# Altium PCB MotionGlove.PcbDoc (part 1 of 2)
Units mm, origin at the board's own origin, x right, y up, seen from the top; angles counter-clockwise.
Board outline 57.6 x 36.45 mm, 2 copper layers (Top Layer, Bottom Layer); 120 components, 83 nets, 444 pads, 151 vias.
Unrouted connection lines stored in the file: 1.
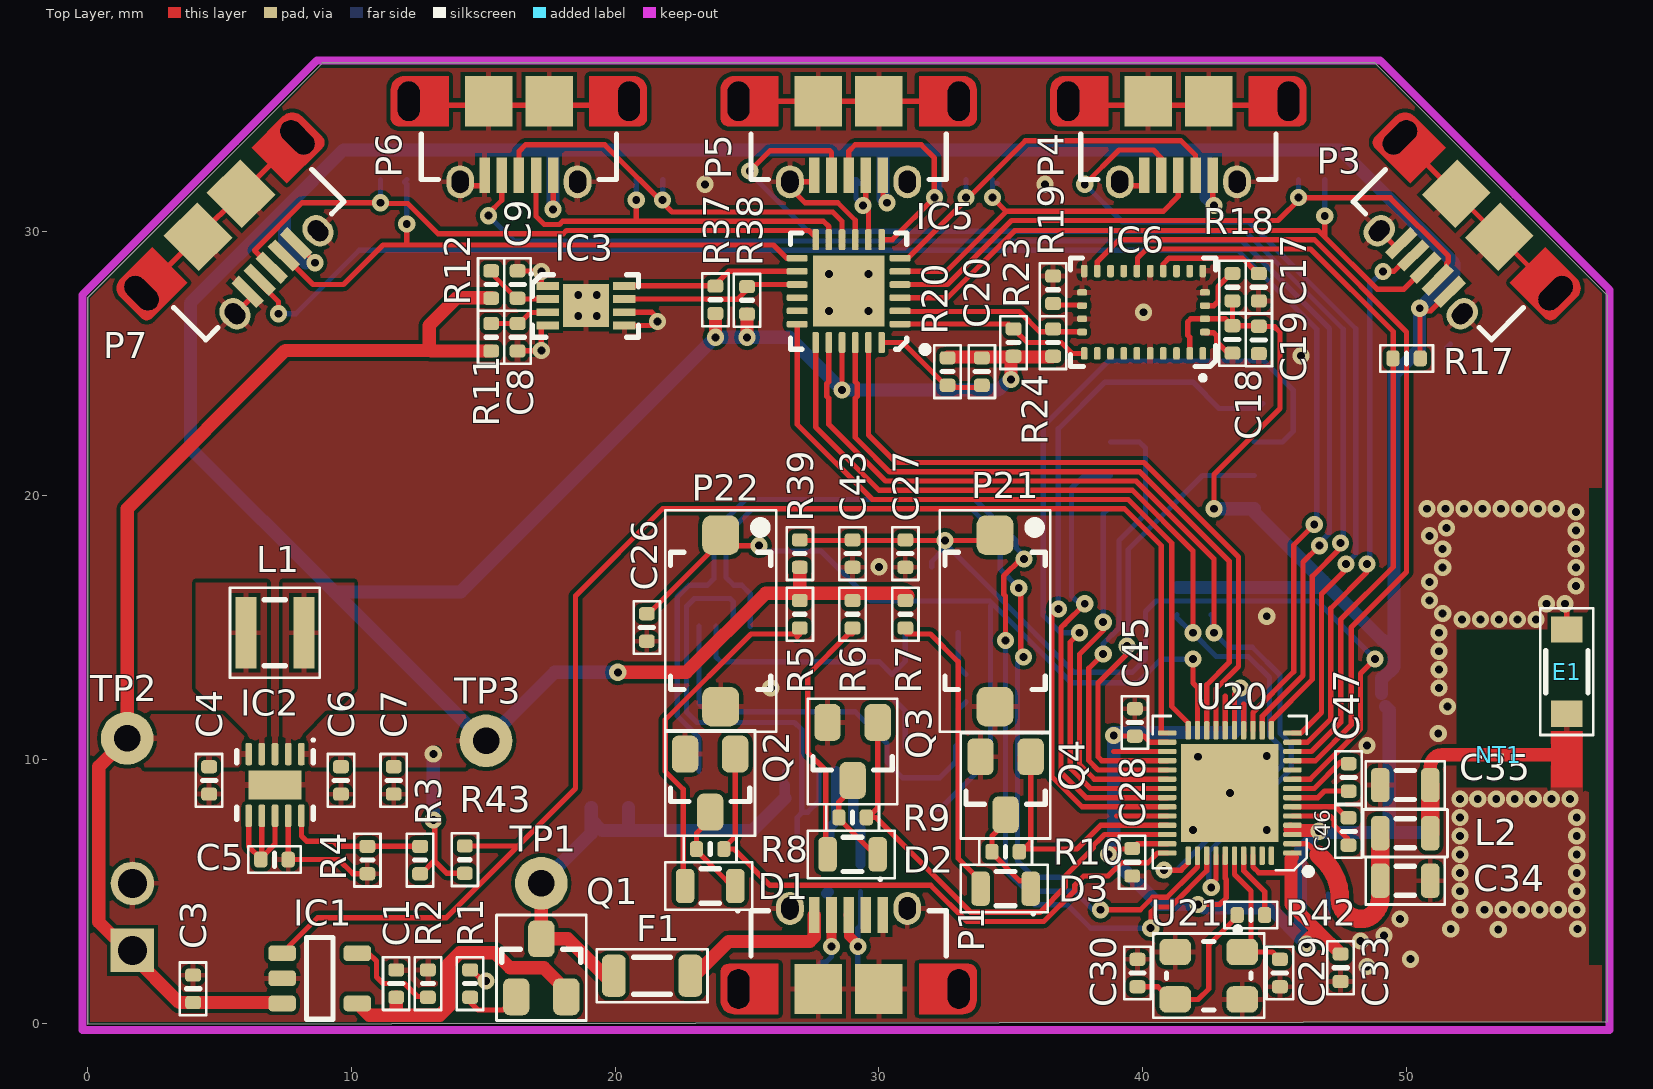
[diagram p0: Top Layer view]
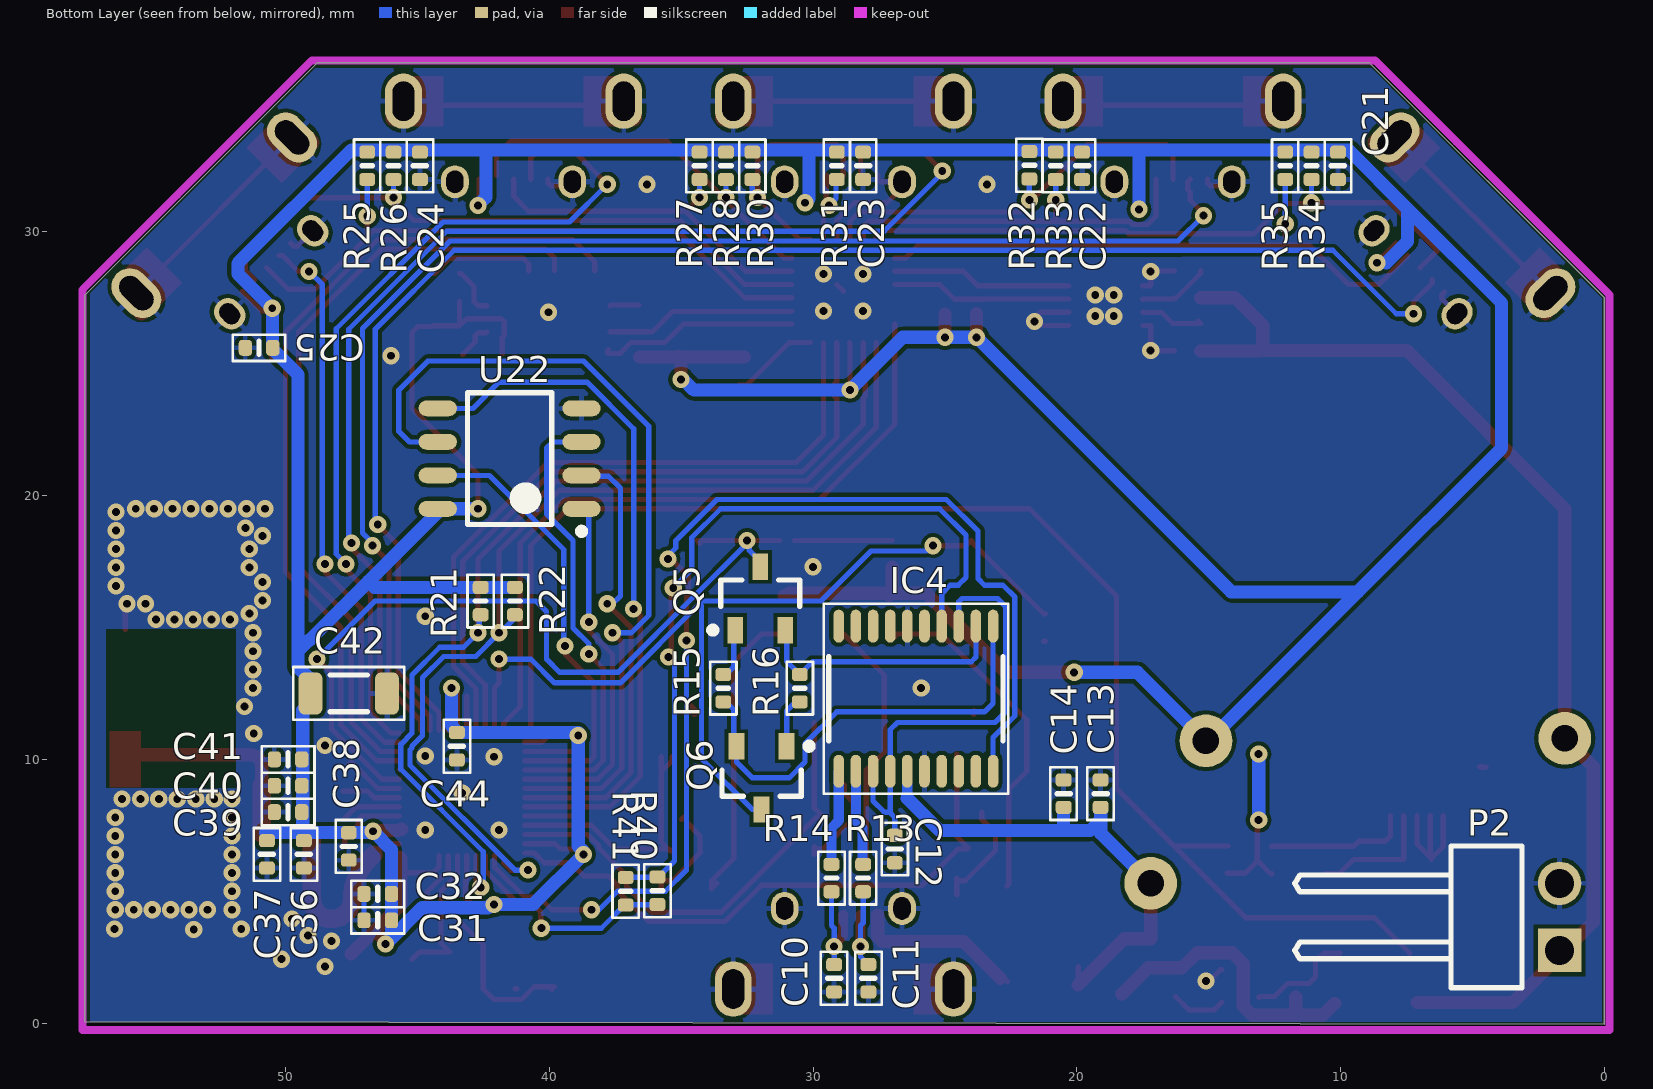
[diagram p1: Bottom Layer view, seen from below]

## Layer stack, top to bottom
Top Solder: solder mask 0.0102, Solder Resist, Dk 3.5
Top Layer: signal copper 0.0356
Dielectric 1: dielectric 0.32, FR-4, Dk 4.8
Bottom Layer: signal copper 0.0356
Bottom Solder: solder mask 0.0102, Solder Resist, Dk 3.5

## Board outline
0,-0.05 0,27.5 8.9,36.4 48.8,36.4 57.6,27.6 57.6,0.05

## Design rules (kind name [scope] priority, off if disabled: settings)
Clearance [All] p1: gap=0.15 ignorepadtopadclearanceinfootprint=FALSE except(0: Arc-Hole Track-Hole SMDPad-Hole THPad-Hole Via-Hole Fill-Hole Poly-Hole Region-Hole Text-Hole)
DiffPairsRouting [All] p1: maxlimit=0.254 minlimit=0.254 mostfreqgap=0.254 toplayer_minwidth=0.381 toplayer_maxwidth=0.381 toplayer_prefwidth=0.381 bottomlayer_minwidth=0.381 bottomlayer_maxwidth=0.381 bottomlayer_prefwidth=0.381 maxuncoupledlength=12.7
HoleSize [All] p1: absolutevalues=TRUE maxlimit=6 minlimit=0.3 maxpercent=80.000 minpercent=20.000
HoleToHoleClearance [All] p1: gap=0.3 allowstackedmicrovias=FALSE
MinimumAnnularRing [not IsVia] p1: minimumring=0.2
MinimumSolderMaskSliver [All] p1: minsoldermaskwidth=0.15
PlaneClearance [All] p1: clearance=0.5
PlaneConnect [All] p1: planeconnectstyle=Relief reliefexpansion=0.5 reliefentries=4 reliefconductorwidth=0.3 reliefairgap=0.3
PolygonConnect PolygonConnect_Via [IsVia] p1: connectstyle=Direct reliefconductorwidth=0.2 reliefentries=4 polygonreliefangle="90 Angle" airgapwidth=0.15
PolygonConnect [All] p2: connectstyle=Relief reliefconductorwidth=0.2 reliefentries=4 polygonreliefangle="90 Angle" airgapwidth=0.15
RoutingVias [All] p1: holewidth=0.3 width=0.65 viastyle="Through Hole" minholewidth=0.3 minwidth=0.65 maxholewidth=0.3 maxwidth=0.65
ShortCircuit ShortCircuit_antenna [InNet('GND') vs InNet('NetC37_2')] p1: allowed=TRUE
ShortCircuit [All] p2: allowed=FALSE
SilkToSilkClearance [All vs not (AsMM(Width) = 0.099)] p1: silktosilkclearance=0.01
SilkToSolderMaskClearance [IsPad vs not (AsMM(Width) = 0.099)] p1: minsilkscreentomaskgap=0.01 clearancetoexposedcopper=TRUE
SolderMaskExpansion SolderMaskExpansion_Via [IsVia] p1: expansion=-0.125
SolderMaskExpansion [All] p2: expansion=0.05
Width [All] p1: maxlimit=3 minlimit=0.15 preferedwidth=0.2
21 further rules are at their usual default settings.

## Classes and differential pairs
net class CoplanarWaveguide: LNA_IN
differential pair USB_IC: +USB_IC_P -USB_IC_N
differential pair D-: +D- -D-
differential pair D+: +D+ -D+

## Components (designator, comment, footprint, x,y, rotation, side; value= is the part's Value field where it differs from the comment)
C1 "4u7" CAPC1005X55 11.7,1.5 r270 top
C3 "4u7" CAPC1005X55 4,1.3 r270 top
C4 "4u7" CAPC1005X55 4.606,9.202 r90 top
C5 "100n" CAPC1005X55 7.086,6.202 r0 top
C6 "4u7" CAPC1005X55 9.606,9.202 r90 top
C7 "4u7" CAPC1005X55 11.606,9.202 r90 top
C8 "100n" CAPC1005X55 16.3,26 r90 top
C9 "4u7" CAPC1005X55 16.3,28 r270 top
C10 "47pF" CAPC1005X55 29.2,1.7 r270 bottom value=47p
C11 "47pF" CAPC1005X55 27.9,1.7 r90 bottom value=47p
C12 "100n" CAPC1005X55 26.9,6.6 r90 bottom
C13 "4u7" CAPC1005X55 19.1,8.7 r90 bottom
C14 "100n" CAPC1005X55 20.5,8.7 r90 bottom
C17 "100n" CAPC1005X55 44.4,27.9 r90 top
C18 "100n" CAPC1005X55 43.4,25.92 r90 top
C19 "100n" CAPC1005X55 44.4,25.9 r90 top
C20 "4u7" CAPC1005X55 33.9,24.7 r90 top
C21 "100n" CAPC1005X55 10.1,32.5 r90 bottom
C22 "100n" CAPC1005X55 19.8,32.5 r90 bottom
C23 "100n" CAPC1005X55 28.1,32.5 r90 bottom
C24 "100n" CAPC1005X55 44.9,32.5 r90 bottom
C25 "100n" CAPC1005X55 51,25.6 r180 bottom
C26 "100n" CAPC1005X55 21.2,15 r270 top
C27 "100n" CAPC1005X55 31,17.8 r270 top
C28 "100n" CAPC1005X55 39.6,6.1 r270 top
C29 "22pF" CAPC1005X55 45.2,1.9 r270 top value=150p
C30 "22pF" CAPC1005X55 39.8,1.9 r90 top value=150p
C31 "1u" CAPC1005X55 46.5,3.9 r180 bottom
C32 "100n" CAPC1005X55 46.5,4.9 r180 bottom
C33 "100n" CAPC1005X55 47.5,2.1 r90 top
C34 "1p" CAPC2012X100 49.95,5.4 r180 top
C35 "1p" CAPC2012X100 49.95,9.025 r0 top
C36 "100n" CAPC1005X55 49.3,6.4 r90 bottom
C37 "100n" CAPC1005X55 50.7,6.4 r90 bottom
C38 "4u7" CAPC1005X55 47.6,6.7 r90 bottom
C39 "4u7" CAPC1005X55 49.9,8 r180 bottom
C40 "4u7" CAPC1005X55 49.9,9 r180 bottom
C41 "4u7" CAPC1005X55 49.9,10 r180 bottom
C42 "100uF" CAPC3216X180 47.6,12.5 r0 bottom value=100u
C43 "100n" CAPC1005X55 29,17.8 r90 top
C44 "100n" CAPC1005X55 43.5,10.5 r90 bottom
C45 "1u" CAPC1005X55 39.7,11.4 r270 top
C46 "270p (NC)" CAPC1005X55 47.8,7.265 r270 top value=270p
C47 "270p (NC)" CAPC1005X55 47.805,9.315 r270 top value=270p
D1 "Red" LEDC2012X90 23.6,5.2 r180 top
D2 "Red" LEDC2012X90 29,6.4 r180 top
D3 "Red" LEDC2012X90 34.8,5.1 r180 top
E1 "Antenna" Antenna 56.075,13.325 r90 top
F1 "" RESC3216X65 21.4,1.8 r180 top
IC1 "MCP738312" MCP738312 8.8,1.7 r0 top
IC2 "TPS63031" TPS63031 7.105,9.032 r270 top
IC3 "MAX17040G+T" MAX17040G+T 18.9,27.2 r0 top
IC4 "FT231XS" SOP65P600X175-20 26.1,12.3 r270 bottom
IC5 "TCA9548A" TCA9548A-Q1 28.85,27.75 r180 top
IC6 "BNO055" BNO055 40.028,26.95 r180 top
L1 "2u2" INDM3030X150 7.1,14.8 r0 top
L2 "3.6nH" INDC2012X135 49.95,7.2 r180 top
NT1 "Net Tie" NetTie 53.45,10.175 r0 top net-tie
P1 "629105150921" 629105150921 28.85,1.295 r0 top
P2 "61300211021" 61300211021 4.47,4.03 r270 bottom
P3 "629105150921" 629105150921 52.7,30.625 r135 top
P4 "629105150921" 629105150921 41.35,34.95 r180 top
P5 "629105150921" 629105150921 28.85,34.95 r180 top
P6 "629105150921" 629105150921 16.35,34.95 r180 top
P7 "629105150921" 629105150921 5,30.625 r225 top
P21 "Pushbutton 1 way" Y35A21120FP 34.4,15.25 r270 top
P22 "Pushbutton 1 way" Y35A21120FP 24,15.25 r270 top
Q1 "IRLML9301TRPBF" SOT95P240X130_SGD-3 17.2,2.1 r90 top
Q2 "BSS138" SOT95P240X130_SGD-3 23.6,9.1 r270 top
Q3 "BSS138" SOT95P240X130_SGD-3 29,10.3 r270 top
Q4 "BSS138" SOT95P240X130_SGD-3 34.8,9 r270 top
Q5 "SS8050-G (NPN)" "SS8050-G (NPN)" 32,16.1 r90 bottom
Q6 "SS8050-G (NPN)" "SS8050-G (NPN)" 31.95,9.3 r270 bottom
R1 "100k" RESC1005X40 14.5,1.5 r270 top
R2 "2k" RESC1005X40 12.9,1.5 r270 top
R3 "0R" RESC1005X40 12.606,6.182 r270 top
R4 "NC" RESC1005X40 10.606,6.182 r90 top value=0R
R5 "68R" RESC1005X40 27,15.5 r90 top
R6 "68R" RESC1005X40 29,15.5 r90 top
R7 "68R" RESC1005X40 31,15.5 r90 top
R8 "100k" RESC1005X40 23.6,6.6 r180 top
R9 "100k" RESC1005X40 29,7.8 r180 top
R10 "100k" RESC1005X40 34.8,6.5 r180 top
R11 "150R" RESC1005X40 15.3,26 r270 top
R12 "1k" RESC1005X40 15.3,28 r270 top
R13 "" RESC1005X40 28.1,5.5 r90 bottom value=27R
R14 "" RESC1005X40 29.3,5.5 r90 bottom value=27R
R15 "10k" RESC1005X40 33.4,12.7 r90 bottom
R16 "10k" RESC1005X40 30.5,12.7 r270 bottom
R17 "10k" RESC1005X40 50,25.2 r0 top
R18 "10k" RESC1005X40 43.4,27.9 r270 top
R19 "10k" RESC1005X40 36.6,27.8 r90 top
R20 "4k7" RESC1005X40 32.6,24.7 r90 top
R21 "4k7" RESC1005X40 42.6,16 r90 bottom
R22 "4k7" RESC1005X40 41.3,16 r90 bottom
R23 "4k7" RESC1005X40 35.1,25.8 r270 top
R24 "4k7" RESC1005X40 36.6,25.8 r270 top
R25 "4k7" RESC1005X40 46.9,32.5 r90 bottom
R26 "4k7" RESC1005X40 45.9,32.5 r90 bottom
R27 "4k7" RESC1005X40 34.3,32.5 r90 bottom
R28 "4k7" RESC1005X40 33.3,32.5 r90 bottom
R30 "4k7" RESC1005X40 32.3,32.5 r90 bottom
R31 "4k7" RESC1005X40 29.1,32.5 r90 bottom
R32 "4k7" RESC1005X40 21.8,32.52 r90 bottom
R33 "4k7" RESC1005X40 20.8,32.5 r90 bottom
R34 "4k7" RESC1005X40 11.1,32.5 r90 bottom
R35 "4k7" RESC1005X40 12.1,32.5 r90 bottom
R37 "4k7" RESC1005X40 23.8,27.42 r270 top
R38 "4k7" RESC1005X40 25,27.4 r270 top
R39 "10k" RESC1005X40 27,17.8 r270 top
R40 "1k" RESC1005X40 35.9,5.02 r90 bottom
R41 "1k" RESC1005X40 37.1,5 r90 bottom
R42 "0R" RESC1005X40 44.1,4.1 r180 top
R43 "10k" RESC1005X40 14.3,6.2 r270 top
TP1 "Testpoint" TP200A 17.2,5.3 r0 top
TP2 "Testpoint" TP200A 1.5,10.8 r90 top
TP3 "Testpoint" TP200A 15.106,10.702 r90 top
U20 "ESP32-S0WD 5x5" "ESP32-S0WD 5x5" 1267.961,-1238.796 r90 top
U21 "40MHz" OSCCC320X250X70 42.5,1.8 r270 top
U22 "W25Q16JVSNI" W25Q16JVSNI 41.5,21.4 r0 bottom

## Footprints (in the part's own frame and the unit in brackets; to place one, negate y for a bottom-side part, rotate by r counter-clockwise, add the part's x,y. Pads: shape width x height; smd on the part's side, far side on the other; paste and mask are expansions set on the pad)
61300211021 [mm] "Pin Header, pitch 2.54 mm, THT, Angled, single row, 2p"
  rect 1.65x1.65 hole 1.1: 1(1.27,2.77)
  round 1.65 hole 1.1: 2(-1.27,2.77)
  silkscreen extent -2.69,-7.27 2.69,1.34, body extent -2.54,-7.27 2.54,3.09, height 2.58
629105150921 [mm] "Micro USB 2.0 Type AB Horizontal"
  rect 0.4x1.35 smd: 1(-1.3,2.805) 2(-0.65,2.805) 3(0,2.805) 4(0.65,2.805) 5(1.3,2.805)
  round 0 / inner oval 1.4x2.1 / far side oval 1.4x2.1 hole 0.825 slot 1.5 at 90 deg: Shell(-4.175,0)
  oval 1.05x1.25 hole 0.65 slot 0.85 at 90 deg: Shell(-2.225,3.055) Shell(2.225,3.055)
  rect 1.8x1.9 smd: Shell(-1.15,0) Shell(1.15,0)
  round 0 / inner round 0 / far side oval 1.4x2.1 hole 0.825 slot 1.5 at 90 deg: Shell(4.175,0)
  Top Layer region: 4.353,-0.95 4.544,-0.912 4.706,-0.804 4.814,-0.641 4.852,-0.45 4.852,-0.45 4.852,0.65 4.83,0.765 4.765,0.862 4.667,0.927 4.553,0.95 4.553,0.95 2.668,0.95 2.668,-0.95
  Top Layer region: -4.353,-0.95 -4.544,-0.912 -4.706,-0.804 -4.814,-0.641 -4.852,-0.45 -4.852,-0.45 -4.852,0.65 -4.83,0.765 -4.765,0.862 -4.667,0.927 -4.553,0.95 -4.553,0.95 -2.668,0.95 -2.668,-0.95
  silkscreen extent -3.7,1.25 3.7,2.97, body extent -4.3,-2.64 4.3,3.23, height 2.76
Antenna [mm]
  rect 1x1.2 smd: 1(-1.6,0) 2(1.6,0)
  silkscreen extent -2.4,-1 2.4,1, body extent -1.6,-0.8 1.6,0.8, height 0.5
BNO055 [mm] "LGA, 28-Leads, Body 5,22x3,83mmx1,18mm, Pitch 0,50mm"
  rrect50% 0.25x0.475 smd: 1(-2.25,1.562) 6(-2.25,-1.562) 7(-1.75,-1.562) 8(-1.25,-1.562) 9(-0.75,-1.562) 10(-0.25,-1.562) 11(0.25,-1.562) 12(0.75,-1.562) 13(1.25,-1.562) 14(1.75,-1.562) 15(2.25,-1.562) 20(2.25,1.562) 21(1.75,1.562) 22(1.25,1.562) 23(0.75,1.562) 24(0.25,1.562) 25(-0.25,1.562) 26(-0.75,1.562) 27(-1.25,1.562) 28(-1.75,1.562)
  rrect50% 0.375x0.25 smd: 2(-2.328,0.75) 3(-2.328,0.25) 4(-2.328,-0.25) 5(-2.328,-0.75) 16(2.328,-0.75) 17(2.328,-0.25) 18(2.328,0.25) 19(2.328,0.75)
  silkscreen extent -2.74,-2.06 2.77,2.55, body extent -2.62,-1.91 2.61,1.91, height 1.18
CAPC1005X55 [mm] "Chip Capacitor; Body 1.0 x 0.5 mm [0402]"
  rrect50% 0.5x0.6 smd: 1(-0.52,0) 2(0.52,0)
  silkscreen extent -1,-0.5 1,0.5, body extent -0.5,-0.25 0.5,0.25, height 0.55
CAPC2012X100 [mm] "Chip Capacitor; Body 2.0 x 1.2 mm [0805]"
  rrect50% 0.7x1.3 smd: 1(-0.95,0) 2(0.95,0)
  silkscreen extent -1.5,-0.9 1.5,0.9, body extent -1,-0.65 1,0.65, height 1
CAPC3216X180 [mm] "Chip Capacitor; Body 3.2 x 1.6 mm [1206]"
  rrect50% 0.9x1.6 smd: 1(-1.45,0) 2(1.45,0)
  silkscreen extent -2.1,-1 2.1,1, body extent -1.6,-0.8 1.6,0.8, height 1.8
"ESP32-S0WD 5x5" [mm] "QFN, 48-Leads, Body 5,00x5,00mm, Pitch 0,35mm, Thermal Pad 3,70x3,70mm, IPC High Density"
  rrect50% 0.2x0.7 smd: 1(1245.246,1222.286) 2(1245.596,1222.286) 3(1245.946,1222.286) 4(1246.296,1222.286) 5(1246.646,1222.286) 6(1246.996,1222.286) 7(1247.346,1222.286) 8(1247.696,1222.286) 9(1248.046,1222.286) 10(1248.396,1222.286) 11(1248.746,1222.286) 12(1249.096,1222.286) 13(1249.446,1222.286) 14(1249.796,1222.286) 25(1249.796,1227.036) 26(1249.446,1227.036) 27(1249.096,1227.036) 28(1248.746,1227.036) 29(1248.396,1227.036) 30(1248.046,1227.036) 31(1247.696,1227.036) 32(1247.346,1227.036) 33(1246.996,1227.036) 34(1246.646,1227.036) 35(1246.296,1227.036) 36(1245.946,1227.036) 37(1245.596,1227.036) 38(1245.246,1227.036)
  rrect50% 0.7x0.2 smd: 15(1249.896,1223.086) 16(1249.896,1223.436) 17(1249.896,1223.786) 18(1249.896,1224.136) 19(1249.896,1224.486) 20(1249.896,1224.836) 21(1249.896,1225.186) 22(1249.896,1225.536) 23(1249.896,1225.886) 24(1249.896,1226.236) 39(1245.146,1226.236) 40(1245.146,1225.886) 41(1245.146,1225.536) 42(1245.146,1225.186) 43(1245.146,1224.836) 44(1245.146,1224.486) 45(1245.146,1224.136) 46(1245.146,1223.786) 47(1245.146,1223.436) 48(1245.146,1223.086)
  rect 3.7x3.7 smd: 49(1247.521,1224.661)
  silkscreen extent 1244.42,1221.56 1250.44,1227.58, body extent 1245,1222.14 1250.05,1227.19, height 0.9
INDC2012X135 [mm] "Inductor; Body 2.0 x 1.2 mm [0805]"
  rrect50% 0.7x1.3 smd: 1(-0.95,0) 2(0.95,0)
  silkscreen extent -1.6,-0.9 1.6,0.9, body extent -1,-0.65 1,0.65, height 1.05
INDM3030X150 [mm] "SMD Inductor"
  rect 0.8x2.7 smd: 1(-1.1,0) 2(1.1,0)
  silkscreen extent -1.7,-1.7 1.7,1.7, body extent -1.55,-1.55 1.55,1.55, height 1.5
LEDC2012X90 [mm] "Chip LED; Body 2.0 x 1.25 mm [0805]"
  rrect50% 0.7x1.3 smd: 1(-0.95,0) 2(0.95,0)
  silkscreen extent -1.6,-0.9 1.7,0.95, body extent -1,-0.65 1,0.65, height 0.9
MAX17040G+T [mm] "Battery Management IC"
  rect 0.85x0.3 smd: 1(-1.45,0.75) 2(-1.45,0.25) 3(-1.45,-0.25) 4(-1.45,-0.75) 5(1.45,-0.75) 6(1.45,-0.25) 7(1.45,0.25) 8(1.45,0.75)
  rect 1.75x1.63 smd: 9(0,0)
  silkscreen extent -2.13,-1.19 1.98,1.24, body extent -1.53,-1.02 1.52,1.03, height 0.8
MCP738312 [mm] "SOT23, 5-Leads, Body 2,90x2,70mm, Pitch 0,95mm, IPC Medium Density"
  round 0.4 on Top Overlay: 0(-1.397,1.8)
  rrect50% 1.05x0.6 smd: 1(-1.425,0.95) 2(-1.425,0) 3(-1.425,-0.95) 4(1.425,-0.95) 5(1.425,0.95)
  silkscreen extent -0.5,-1.55 0.5,1.55, body extent -0.9,-1.55 0.9,1.55, height 1.45
NetTie [mm] "0.1 mm NetTie"
  rect 0.1x0.1 smd paste-0.5 mask+0.102: 1(-0.05,0)
  rect 0.25x0.1 smd paste-0.5 mask+0.102: 2(0.125,0)
OSCCC320X250X70 [mm] "Oscillator 3.2 x 2.5mm"
  rrect50% 1x1.2 smd: 1(-0.9,1.27) 2(-0.9,-1.27) 3(0.9,-1.27) 4(0.9,1.27)
  silkscreen extent -1.85,-2.1 1.6,2.1, body extent -1.25,-1.6 1.25,1.6, height 0.7
RESC1005X40 [mm] "Chip Resistor; Body 1.0 x 0.5 mm [0402]"
  rrect50% 0.5x0.6 smd: 1(-0.52,0) 2(0.52,0)
  silkscreen extent -1,-0.5 1,0.5, body extent -0.5,-0.25 0.5,0.25, height 0.4
RESC3216X65 [mm] "Chip Resistor; Body 3.2 x 1.6 mm [1206]"
  rrect50% 0.9x1.6 smd: 1(-1.45,0) 2(1.45,0)
  silkscreen extent -2.1,-1 2.1,1, body extent -1.55,-0.8 1.55,0.8, height 0.65
SOP65P600X175-20 [mm] "TSOP, 20-Leads, Body 8,6x3,9mm (max), Pitch 0,65mm, IPC Medium Density"
  round 0.4 on Bottom Overlay: 0(-3.45,3.35)
  oval 1.25x0.4 smd: 1(-2.75,2.925) 2(-2.75,2.275) 3(-2.75,1.625) 4(-2.75,0.975) 5(-2.75,0.325) 6(-2.75,-0.325) 7(-2.75,-0.975) 8(-2.75,-1.625) 9(-2.75,-2.275) 10(-2.75,-2.925) 11(2.75,-2.925) 12(2.75,-2.275) 13(2.75,-1.625) 14(2.75,-0.975) 15(2.75,-0.325) 16(2.75,0.325) 17(2.75,0.975) 18(2.75,1.625) 19(2.75,2.275) 20(2.75,2.925)
  silkscreen extent -3.6,-3.5 3.6,3.5, body extent -3,-3.3 3,3.3, height 1.1
SOT95P240X130_SGD-3 [mm] "SOT-23"
  round 0.4 on Top Overlay: 0(-2,1.7)
  rrect50% 1.4x1 smd: D(1.1,0) G(-1.1,0.95) S(-1.1,-0.95)
  silkscreen extent -2,-1.7 2,1.7, body extent -1.2,-1.45 1.2,1.45, height 1.3
"SS8050-G (NPN)" [mm] "SOT23, 3-Leads, Body 2,90x2,45mm, Pitch 0,95mm, IPC Medium Density"
  rect 1x0.6 smd: 1(-1.2,0.95) 2(-1.2,-0.95) 3(1.2,0)
  silkscreen extent -1.32,-1.5 0.7,1.93, body extent -0.7,-1.5 0.7,1.5, height 1.15
TCA9548A-Q1 [mm] "QFN, 24-Leads, Body 4,00x4,00mm, Pitch 0,50mm, Thermal Pad 2,70x2,70mm, IPC Medium Density"
  rrect50% 0.8x0.25 smd: 1(-1.95,1.25) 2(-1.95,0.75) 3(-1.95,0.25) 4(-1.95,-0.25) 5(-1.95,-0.75) 6(-1.95,-1.25) 13(1.95,-1.25) 14(1.95,-0.75) 15(1.95,-0.25) 16(1.95,0.25) 17(1.95,0.75) 18(1.95,1.25)
  rrect50% 0.25x0.8 smd: 7(-1.25,-1.95) 8(-0.75,-1.95) 9(-0.25,-1.95) 10(0.25,-1.95) 11(0.75,-1.95) 12(1.25,-1.95) 19(1.25,1.95) 20(0.75,1.95) 21(0.25,1.95) 22(-0.25,1.95) 23(-0.75,1.95) 24(-1.25,1.95)
  rect 2.7x2.7 smd: 25(0,0)
  silkscreen extent -3.02,-2.2 2.2,2.33, body extent -2.05,-2.05 2.05,2.05, height 1
TP200A [mm]
  round 2 hole 1: 1(0,0)
TPS63031 [mm] "High Efficient Single Inductor Buck-Boost Converter with 1-A Switches"
  rrect50% 0.85x0.25 smd: 1(-1.17,1) 2(-1.17,0.5) 3(-1.17,0) 4(-1.17,-0.5) 5(-1.17,-1) 6(1.17,-1) 7(1.17,-0.5) 8(1.17,0) 9(1.17,0.5) 10(1.17,1)
  rect 1.09x2 smd: 11(0,0)
  silkscreen extent -1.75,-1.45 1.3,1.5, body extent -1.3,-1.3 1.3,1.3, height 0.8
W25Q16JVSNI [mm] "16M-bit, 2.7V-3.6V SOIC 150-mil"
  oval 1.45x0.6 smd: 1(-2.725,1.905) 2(-2.725,0.635) 3(-2.725,-0.635) 4(-2.725,-1.905) 5(2.725,-1.905) 6(2.725,-0.635) 7(2.725,0.635) 8(2.725,1.905)
  silkscreen extent -2.85,-2.5 1.6,2.88, body extent -2,-2.5 2,2.5, height 1.35
Y35A21120FP [mm]
  rrect50% 1.5x1.4 smd: 1(-3.25,0) 2(3.25,0)
  silkscreen extent -4.2,-2.1 4.2,2.1, body extent -3.65,-1.9 3.65,1.9, height 2.5

## Part data
C1 C9: library part 1257, "Ceramic Chip Capacitor", Dielectric=Ceramic, Manufacturer=TDK, Manufacturer ID=C1005X5R1A475K050BC, Tolerance=±10%, Voltage=10V, Characteristic=X5R, ComponentLink1Description=Website, ComponentLink1URL=http://product.tdk.com/capacitor/mlcc/detailed_information.php?lang=en&part_no=C1005X5R1A475K050BC, ComponentLink2Description=Datasheet, ComponentLink2URL=http://product.tdk.com/en/catalog/datasheets/mlcc_commercial_general_en.pdf, Digikey=445-13820-1-ND, Distributor 3=Mouser, Distributor Number 3=810-C1005X5R1A475KBC, Footprint / Size=C0402, ID=1257, Type="Standard Ceramic", UBiKS Number=UBiKS-C00144Y
C3 C4 C6 C7 C13 C20: library part 1253, "Ceramic Chip Capacitor", Dielectric=Ceramic, Manufacturer=Murata, Manufacturer ID=GRM155R60J475ME47D, Tolerance=±20%, Voltage=6.3V, Characteristic=X5R, ComponentLink1Description=Website, ComponentLink1URL=http://www.murata.com/, ComponentLink2Description=Datasheet, ComponentLink2URL=http://www.farnell.com/datasheets/1769893.pdf, Farnell=2426952, Footprint / Size=C0402, ID=1253, Type="Standard Ceramic", UBiKS Number=UBiKS-C00140A
C5 C12 C14: library part 1066, Dielectric=Ceramic, Manufacturer=Kemet, Manufacturer ID=C0402C104K4RAC, Tolerance=±15%, Voltage=16V, Characteristic=X7R, ComponentLink1Description=Website, ComponentLink1URL=http://kemet.com/, ComponentLink2Description=Datasheet, ComponentLink2URL=http://www.kemet.com/kemet/web/homepage/kechome.nsf/vapubfiles/F3102_X7R.pdf/$file/F3102_X7R.pdf, Digikey=399-3521-1-ND, Distributor 3=Mouser, Distributor Number 3=80-C0402C104K4RAUTO, Farnell=1288252, Footprint / Size=C0402, ID=1066, Quantity=0, Type="Standard Ceramic", UBiKS Number=UBiKS-C00001I, Unit Price=0
C8 C17 C18 C19 C21 C22 C23 C24 C25 C26 C27 C28 C32 C33 C36 C37 C43 C44: library part 1066, "Ceramic Chip Capacitor", Dielectric=Ceramic, Manufacturer=Kemet, Manufacturer ID=C0402C104K4RAC, Tolerance=±15%, Voltage=16V, Characteristic=X7R, ComponentLink1Description=Website, ComponentLink1URL=http://kemet.com/, ComponentLink2Description=Datasheet, ComponentLink2URL=http://www.kemet.com/kemet/web/homepage/kechome.nsf/vapubfiles/F3102_X7R.pdf/$file/F3102_X7R.pdf, Digikey=399-3521-1-ND, Distributor 3=Mouser, Distributor Number 3=80-C0402C104K4RAUTO, Farnell=1288252, Footprint / Size=C0402, ID=1066, Quantity=0, Type="Standard Ceramic", UBiKS Number=UBiKS-C00001I, Unit Price=0
C10 C11: library part 1076, Dielectric=Ceramic, Manufacturer=Kemet, Manufacturer ID=C0402C470J5GAC, Tolerance=±5%, Voltage=50V, Characteristic=NP0, ComponentLink1Description=Website, ComponentLink1URL=http://kemet.com/, ComponentLink2Description=Datasheet, ComponentLink2URL=http://www.kemet.com/kemet/web/homepage/kechome.nsf/vapubfiles/F3102_C0G.pdf/$file/F3102_C0G.pdf, Farnell=1414592, Footprint / Size=C0402, ID=1076, Quantity=0, Type="Standard Ceramic", UBiKS Number=UBiKS-C00011N, Unit Price=0
C29 C30: library part 1085, "Ceramic Chip Capacitor", Dielectric=Ceramic, Manufacturer=Kemet, Manufacturer ID=C0402C151J5GAC, Tolerance=±5%, Voltage=50V, Characteristic=NP0, ComponentLink1Description=Website, ComponentLink1URL=http://kemet.com/, ComponentLink2Description=Datasheet, ComponentLink2URL=http://www.kemet.com/kemet/web/homepage/kechome.nsf/vapubfiles/F3102_C0G.pdf/$file/F3102_C0G.pdf, Farnell=1414578, Footprint / Size=C0402, ID=1085, Quantity=0, Type="Standard Ceramic", UBiKS Number=UBiKS-C00020M, Unit Price=0
C31 C45: library part 1079, "Ceramic Chip Capacitor", Dielectric=Ceramic, Manufacturer=Kemet, Manufacturer ID=C0402C105K9PAC, Tolerance=±10%, Voltage=6.3V, Characteristic=X5R, ComponentLink1Description=Website, ComponentLink1URL=http://kemet.com/, ComponentLink2Description=Datasheet, ComponentLink2URL=http://www.kemet.com/kemet/web/homepage/kechome.nsf/vapubfiles/F3102_X5R.pdf/$file/F3102_X5R.pdf, Farnell=1288253, Footprint / Size=C0402, ID=1079, Quantity=0, Type="Standard Ceramic", UBiKS Number=UBiKS-C00014F, Unit Price=0
C34 C35: library part 1175, "Ceramic Chip Capacitor", Dielectric=Ceramic, Manufacturer=Kemet, Manufacturer ID=C0805C100J5GACTU, Tolerance=±10%, Voltage=50V, Characteristic=NP0, ComponentLink1Description=Website, ComponentLink1URL=http://kemet.com/, ComponentLink2Description=Datasheet, ComponentLink2URL=http://www.kemet.com/kemet/web/homepage/kechome.nsf/vapubfiles/F3102_C0G.pdf/$file/F3102_C0G.pdf, Farnell=1414654, Footprint / Size=C0805, ID=1175, Quantity=0, Type="Standard Ceramic", UBiKS Number=UBiKS-C00089S, Unit Price=0
C38 C39 C40 C41: library part 1253, Dielectric=Ceramic, Manufacturer=Murata, Manufacturer ID=GRM155R60J475ME47D, Tolerance=±20%, Voltage=6.3V, Characteristic=X5R, ComponentLink1Description=Website, ComponentLink1URL=http://www.murata.com/, ComponentLink2Description=Datasheet, ComponentLink2URL=http://www.farnell.com/datasheets/1769893.pdf, Farnell=2426952, Footprint / Size=C0402, ID=1253, Type="Standard Ceramic", UBiKS Number=UBiKS-C00140A
C42: library part 1250, Dielectric=Ceramic, Manufacturer=Murata, Manufacturer ID=GRM31CR60J107ME39L, Tolerance=±20%, Voltage=6.3V, Characteristic=X5R, ComponentLink1Description=Website, ComponentLink1URL=http://www.murata.com/, ComponentLink2Description=Datasheet, ComponentLink2URL=http://search.murata.co.jp/Ceramy/image/img/A01X/G101/ENG/GRM31CR60J107ME39-01.pdf, Digikey=490-4539-1-ND, Farnell=1735535, Footprint / Size=C1206, ID=1250, Type="Standard Ceramic", UBiKS Number=UBiKS-C00137L
C46 C47: library part 1218, "Ceramic Chip Capacitor", Dielectric=Ceramic, Manufacturer=Kemet, Manufacturer ID=C0402C271J5GAC, Tolerance=±5%, Voltage=50V, Characteristic=NP0, ComponentLink1Description=Website, ComponentLink1URL=http://kemet.com/, ComponentLink2Description=Datasheet, ComponentLink2URL=http://www.kemet.com/kemet/web/homepage/kechome.nsf/vapubfiles/F3102_C0G.pdf/$file/F3102_C0G.pdf, Farnell=1414585, Footprint / Size=C0402, ID=1218, Quantity=0, Type="Standard Ceramic", UBiKS Number=UBiKS-C00124O, Unit Price=0
D1 D2 D3: library part 6010, "SMD Chip LED", Color=red, Manufacturer=Avago, Manufacturer ID=HSMS-C170, ComponentLink1Description=Website, ComponentLink1URL=http://www.avagotech.com/, ComponentLink2Description=Datasheet, ComponentLink2URL=http://www.avagotech.com/docs/AV02-0376EN, Farnell=5790839, Footprint / Size=LED0805, ID=6010, Type="Standard LED", UBiKS Number=UBiKS-V00002H
E1: "Antenna (Chip)"
F1: library part 8021, "0.5A PTC Fuse", Manufacturer=POLY-FUSE, Manufacturer ID=1206L050/15YR, ComponentLink1Description=Website, ComponentLink1URL=http://www.littelfuse.de/, ComponentLink2Description=Datasheet, ComponentLink2URL=http://www.littelfuse.com/data/en/Data_Sheets/Littelfuse_PTC_1206L.pdf, Digikey=F3733TR-ND, Footprint / Size="3.2mm x 1.6 mm x 0.75mm", ID=8021, Type=Fuse, UBiKS Number=UBiKS-M00020W
IC1: Supplier Part Number 1=1332158, Supplier 1=Farnell
IC2: Supplier Part Number 1=296-23904-6-ND, Supplier 1=Digi-Key
IC3: Supplier Part Number 1=700-MAX17040G+T, Supplier 1=Mouser
IC4: library part 5331, "USB to UART", Manufacturer=FTDI, Supplier Part Number 1=2081328, ComponentLink1Description=Website, ComponentLink1URL=http://www.ftdichip.com/, ComponentLink2Description=Datasheet, ComponentLink2URL=http://www.ftdichip.com/Support/Documents/DataSheets/ICs/DS_FT231X.pdf, Digikey=768-1129-1-ND, Distributor Number 3=895-FT231XS-R, Farnell=2081328, Footprint / Size=SOP-20, ID=5331, Manufacturer ID=FT231XS, Pins=20, Supplier 1=Farnell, Type=USB, UBiKS Number=UBiKS-U00288M
IC5: Supplier Part Number 1=595-TCA9548ARGER, Supplier 1=Mouser
IC6: Supplier Part Number 1=262-BNO055, Supplier 1=Mouser
L1: library part 3006, "SMD Inductor", Manufacturer="Taiyo Yuden", Manufacturer ID=NR3015T2R2M, max DC Current=1.48A, Resistance=72mR, Tolerance="± 20%", ComponentLink1Description=Website, ComponentLink1URL=http://www.yuden.co.jp/, ComponentLink2Description=Datasheet, ComponentLink2URL=http://www.yuden.co.jp/ut/product/pdf/enr4_e.pdf, Digikey=587-1648-6-ND, Footprint / Size=IND3x3x1,5mm, ID=3006, Type=Inductor, UBiKS Number=UBiKS-L00005P
L2: library part 3012, "Chip Ferrit Bead Impedanz 220R", Manufacturer="Taiyo Yuden", Manufacturer ID=FBMH2012HM221-T, max DC Current=2A, Resistance=60mR, Tolerance="± 25%", ComponentLink1Description=Website, ComponentLink1URL=http://www.yuden.co.jp/, ComponentLink2Description=Datasheet, ComponentLink2URL=http://www.yuden.co.jp/us/product/pdf/efbm_e.pdf, Digikey=587-1748-1-ND, Farnell=1611985, Footprint / Size=IND0805, ID=3012, Type="Ferrit Bead", UBiKS Number=UBiKS-L00009N
NT1: library part NetTie
P1 P3 P4 P5 P6 P7: "Micro USB 2.0 Type AB Receptacle WR-COM, Horizontal, SMT", Contact Resistance="30 mOhm", Operating Temperature="-40 to 85 degC", Rated Current="1.8 A", Supplier Part Number 1=710-629105150921, Working Voltage="30 VAC", ComponentLink1Description=Manufacturer, ComponentLink1URL=http://www.we-online.de, ComponentLink2Description=Datasheet, ComponentLink2URL=https://katalog.we-online.de/em/datasheet/629105150921.pdf, Connector Type="Micro USB 2.0 Type AB", Gender=Receptacle, Mounting Technology=SMT, Orientation=Horizontal, Packaging="Tape and Reel", Part Number=629105150921, Published Date="September 2018", Publisher="Wurth Elektronik", Supplier 1=Mouser
P2: "THT Angled Pin Header WR-PHD, Pitch 2.54 mm, Single Row, 2 pins", Contact Resistance="20 mOhm", Operating Temperature="-40 to 105 degC", Rated Current="3 A", Withstanding Voltage="500 VAC", Working Voltage="250 VAC", ComponentLink1Description=Manufacturer, ComponentLink1URL=http://www.we-online.de, ComponentLink2Description=Datasheet, ComponentLink2URL=https://katalog.we-online.de/em/datasheet/6130xx11021.pdf, Gender=Male, Mounting Technology=THT, Orientation=Angled, Packaging=Bag, Part Number=61300211021, Pin Number=2, Pitch="2.54 mm", Published Date="August 2018", Publisher="Wurth Elektronik", Row Number=Single
P21 P22: library part 7004, Manufacturer=C&K, Manufacturer ID=Y35A21110FPLFS, ComponentLink1Description=Website, ComponentLink1URL=http://www.ck-components.com, ComponentLink2Description=Datasheet, ComponentLink2URL=\\lift\sct-software\altium\sct-svn\0900766b80c5f4ae.pdf, Distributor 3=RS, Distributor Number 3=102-377, ID=7004, Type=Pushbutton, UBiKS Number=UBiKS-S00003K
Q1: library part 4524, "P-channel enhancement mode MOS transistor", Manufacturer="International Rectifier", ComponentLink1Description=Website, ComponentLink1URL=http://www.irf.com, ComponentLink2Description=Datasheet, ComponentLink2URL=http://www.irf.com/product-info/datasheets/data/irlml9301pbf.pdf, Digikey=IRLML9301TRPBFCT-ND, Farnell=1831089RL, Footprint / Size=SOT-23, ID=4524, Manufacturer ID=IRLML9301TRPBF, Type="MOSFET P enh.", UBiKS Number=UBiKS-Q00018R
Q2 Q3 Q4: library part 4512, "N-channel enhancement mode MOS transistor", Manufacturer=Infineon, ComponentLink1Description=Website, ComponentLink1URL=http://www.infineon.com, ComponentLink2Description=Datasheet, ComponentLink2URL=http://www.farnell.com/datasheets/46045.pdf, Farnell=1156434, Footprint / Size=SOT-23, ID=4512, Manufacturer ID=BSS138, Type="MOSFET N enh.", UBiKS Number=UBiKS-Q00007G
Q5 Q6: Supplier Part Number 1=750-SS8050-G, Supplier 1=Mouser
R1 R8 R9 R10: library part 2121, "Resistor", Manufacturer=Multicomp, Manufacturer ID="MC 0.0625W 0402 1% 100K", Power rating=0.063W, Temperatur coeff=±100ppm/°C, Tolerance=±1%, ComponentLink1Description=Website, ComponentLink2Description=Datasheet, ComponentLink2URL=http://www.farnell.com/datasheets/318400.pdf, Element Type="Thick Film", Farnell=1358096, Footprint / Size=R0402, ID=2121, Type=Standard, UBiKS Number=UBiKS-R00005V
R2: library part 2144, "Resistor", Manufacturer=Multicomp, Manufacturer ID="MC 0.0625W 0402 1% 2K", Power rating=0.063W, Temperatur coeff=±100ppm/°C, Tolerance=±1%, ComponentLink1Description=Website, ComponentLink2Description=Datasheet, ComponentLink2URL=http://www.farnell.com/datasheets/318400.pdf, Element Type="Thick Film", Farnell=1358050, Footprint / Size=R0402, ID=2144, Type=Standard, UBiKS Number=UBiKS-R00028X
R3 R4 R42: library part 2117, "Resistor", Manufacturer=Multicomp, Manufacturer ID="MC 0.0625W 0402 1% 0R", Power rating=0.063W, Temperatur coeff=±200ppm/°C, Tolerance=±1%, ComponentLink1Description=Website, ComponentLink2Description=Datasheet, ComponentLink2URL=http://www.farnell.com/datasheets/318400.pdf, Element Type="Thick Film", Farnell=1357983, Footprint / Size=R0402, ID=2117, Type=Standard, UBiKS Number=UBiKS-R00001X
R5 R6 R7: library part 2292, "Resistor", Manufacturer=Multicomp, Manufacturer ID="MC 0.0625W 0402 1% 68R", Power rating=0.063W, Temperatur coeff=±200ppm/°C, Tolerance=±1%, ComponentLink1Description=Website, ComponentLink2Description=Datasheet, ComponentLink2URL=http://www.farnell.com/datasheets/318400.pdf, Element Type="Thick Film", Farnell=1358011, Footprint / Size=R0402, ID=2292, Quantity=0, Type=Standard, UBiKS Number=UBiKS-R00160Z, Unit Price=0
R11: library part 2219, "Resistor", Manufacturer=Multicomp, Manufacturer ID="MC 0.0625W 0402 1% 150R", Power rating=0.063W, Temperatur coeff=±100ppm/°C, Tolerance=±1%, ComponentLink1Description=Website, ComponentLink2Description=Datasheet, ComponentLink2URL=http://www.farnell.com/datasheets/318400.pdf, Element Type="Thick Film", Farnell=1358020, Footprint / Size=R0402, ID=2219, Type=Standard, UBiKS Number=UBiKS-R00096U
R12 R40 R41: library part 2154, "Resistor", Manufacturer=Multicomp, Manufacturer ID="MC 0.0625W 0402 1% 1K", Power rating=0.063W, Temperatur coeff=±100ppm/°C, Tolerance=±1%, ComponentLink1Description=Website, ComponentLink2Description=Datasheet, ComponentLink2URL=http://www.farnell.com/datasheets/318400.pdf, Element Type="Thick Film", Farnell=1358043, Footprint / Size=R0402, ID=2154, Type=Standard, UBiKS Number=UBiKS-R00038C
R13 R14: library part 2282, "Resistor", Manufacturer=Multicomp, Manufacturer ID="MC 0.0625W 0402 1% 27R", Power rating=0.063W, Temperatur coeff=±200ppm/°C, Tolerance=±1%, ComponentLink1Description=Website, ComponentLink2Description=Datasheet, ComponentLink2URL=http://www.farnell.com/datasheets/318400.pdf, Element Type="Thick Film", Farnell=1358000, Footprint / Size=R0402, ID=2282, Quantity=0, Type=Standard, UBiKS Number=UBiKS-R00154S, Unit Price=0
R15 R16 R17 R18 R19 R39 R43: library part 2123, "Resistor", Manufacturer=Multicomp, Manufacturer ID="MC 0.0625W 0402 1% 10K", Power rating=0.063W, Temperatur coeff=±100ppm/°C, Tolerance=±1%, ComponentLink1Description=Website, ComponentLink2Description=Datasheet, ComponentLink2URL=http://www.farnell.com/datasheets/318400.pdf, Element Type="Thick Film", Farnell=1358069, Footprint / Size=R0402, ID=2123, Type=Standard, UBiKS Number=UBiKS-R00007H
R20 R21 R22 R23 R24 R25 R26 R27 R28 R30 R31 R32 R33 R34 R35 R37 R38: library part 2131, "Resistor", Manufacturer=Multicomp, Manufacturer ID="MC 0.0625W 0402 1% 4K7", Power rating=0.063W, Temperatur coeff=±100ppm/°C, Tolerance=±1%, ComponentLink1Description=Website, ComponentLink2Description=Datasheet, ComponentLink2URL=http://www.farnell.com/datasheets/318400.pdf, Element Type="Thick Film", Farnell=1358060, Footprint / Size=R0402, ID=2131, Type=Standard, UBiKS Number=UBiKS-R00015A
TP1 TP2 TP3: library part 8002, "Testpoint 2mm", ID=8002, Type=Testpoint, UBiKS Number=UBiKS-M00002Y
U20: Supplier Part Number 1=356-ESP32-S0WD, Supplier 1=Mouser
U21: library part 9048, "Ultra Miniature Ceranic SMD Crystal", Manufacturer=Abracon, Manufacturer ID=ABM8-40.000MHZ-B2-T, ComponentLink1Description=Website, ComponentLink1URL=http://www.abracon.com/, ComponentLink2Description=Datasheet, ComponentLink2URL=http://www.abracon.com/Resonators/abm8.pdf, Digikey=535-9147-1-ND, Distributor 3=Mouser, Distributor Number 3=815-ABM8-40-B2-T, Footprint / Size="XTAL3.2 x 2.5", ID=9048, Type=Crystal, UBiKS Number=UBiKS-X00038I
U22: Supplier Part Number 1=W25Q16JVSNIQ-ND, Supplier 1=Digi-Key

## Via types
v1: diameter 0.65, hole 0.3, Top Layer to Bottom Layer, 151 vias

## Nets (pads, with @x,y where several pads share a name; then routed paths per layer and width w, separated by ;. In a path a pad name is that pad's centre, name@x,y a point inside that pad or via, vN(x,y) a via of type N, cw(c..) or ccw(c..) an arc to the next point about the centre after c; other vN are vias at no path point)
BAT_LED1: Q2.G R8.1 U20.38 | length 22.9
  Top Layer w0.2: Q2.G@24.55,10.2 24.55,7.08 24.12,6.65 24.145,6.625 24.17,6.6 24.5,6.6 25.875,5.225 31.964,5.225 33.339,3.85 36.246,3.85 37.425,5.029 37.425,5.238 37.762,5.575 38.688,5.575 39.193,6.08 40.19,6.08 40.56,6.45 U20.38@40.925,6.45
BAT_LED2: Q3.G R9.1 U20.36 | length 18.2
  Top Layer w0.2: R9.1@29.607,7.676 29.625,7.695 29.672,7.742 R9.1@29.731,7.8 ; R9.1@29.607,7.807 29.614,7.8 R9.1@29.731,7.8 ; R9.1@29.665,7.865 29.95,8.15 Q3.G@29.95,11.4 ; U20.36@40.925,7.15 38.55,7.15 38.475,7.075 38.47,7.075 38.4,7.005 38.125,6.73 38.125,6.638 37.075,5.588 37.075,5.174 36.101,4.2 33.484,4.2 29.884,7.8 R9.1@29.731,7.8
BAT_LED3: Q4.G R10.1 U20.35 | length 10.2
  Top Layer w0.2: R10.1@35.32,6.5 35.32,6.56 R10.1@35.46,6.56 ; Q4.G@35.35,10.1 35.35,9.95 35.75,9.55 35.75,6.85 35.5,6.6 37.5,6.6 38.05,7.15 38.4,7.5 38.7,7.5 U20.35@40.925,7.5 ; Q4.G@35.75,9.66 Q4.G@35.75,10.1
BOOT_MODE_0: C26.1 P22.1 Q6.3 U20.23 | length 36.2
  Top Layer w0.2: C26.1@21.2,15.52 21.26,15.52 24,18.26 24,18.3 24.2,18.1 v1(25.45,18.1) ; v1(41.9,13.8) 41.9,12.9 42.075,12.725 U20.23@42.075,11.1
  Bottom Layer w0.2: v1(25.45,18.1) 25.5,18.1 25.7,17.9 27.8,17.9 29.7,16 34.2,16 34.3,15.9 ; Q6.3@31.95,8.1 32.3,8.1 34.225,10.025 34.225,15.825 34.3,15.9 ; v1(41.9,13.8) 40.7,13.8 39.8,12.9 37.3,12.9 34.3,15.9
CHIP_PU: C27.1 C43.2 P21.1 Q5.3 R39.1 U20.9 | length 36
  Top Layer w0.2: R39.1@27,18.3 C27.1@30.72,18.3 ; C27.1@31.26,18.3 v1(32.5,18.3) P21.1@34.4,18.3 ; P21.1@34.264,18.184 P21.1@34.316,18.184 ; U20.9@45.675,9.25 46.35,9.25 48.25,11.15 48.25,13.25 v1(48.8,13.8)
  Bottom Layer w0.2: Q5.3@32,17.3 32,17.5 32.414,17.914 32.414,18.214 v1(32.5,18.3) ; v1@32.5,18.4 32.55,18.35 32.6,18.3 32.6,18.095 34.445,16.25 37.395,13.3 39.6,13.3 40.1,13.8 40.1,15.6 40.5,16 46.6,16 v1(48.8,13.8)
D+: C10.1 P1.3 R14.1 | length 4.1
  Top Layer w0.381: P1.3@28.85,4.1 28.859,4.091 28.859,3.313 29.2,2.973 v1(29.2,2.9)
  Bottom Layer w0.2: C10.1@29.2,2.22 v1(29.2,2.9) 29.2,3.6 29.3,3.7 R14.1@29.3,4.98
D-: C11.2 P1.2 R13.1 | length 4.5
  Top Layer w0.2: P1.2@28.1,3.8 P1.2@28.19,3.891
  Top Layer w0.381: v1(28.2,2.9) P1.2@28.2,4.1
  Bottom Layer w0.2: C11.2@27.9,2.1 C11.2@27.9,2.22 28.2,2.52 v1(28.2,2.9) 28.2,3.7 28.1,3.8 28.1,4.761 R13.1@27.99,4.871
  Bottom Layer w0.381: C11.2@27.85,2.22 C11.2@27.9,2.22 ; R13.1@27.99,4.92 28.05,4.98 R13.1@28.1,4.98
DTR: IC4.1 Q6.2 R15.1 | length 17
  Bottom Layer w0.2: IC4.1@23.175,15.05 23.175,12.125 23.5,11.8 29.1,11.8 30.3,10.6 30.3,9.9 30.9,9.3 32.3,9.3 32.9,9.9 Q6.2@32.9,10.5 ; Q6.2@33,10.4 33,11.88 R15.1@33.3,12.18
Finger_Tap1: P3.4 U20.13 | length 21.1
  Top Layer w0.15: U20.13@45.675,10.65 U20.13@45.699,10.674
  Top Layer w0.2: U20.13@45.675,10.65 46.245,10.65 47.125,11.53 47.125,15.725 48.5,17.1 v1(48.5,17.4) ; v1(49.1,28.5) 49.514,28.5 50.116,29.101 P3.4@50.257,29.101
  Bottom Layer w0.2: v1(48.5,17.4) 48.5,17.35 48.6,17.45 48.6,28 v1(49.1,28.5)
Finger_Tap2: P4.4 U20.14 | length 33.7
  Top Layer w0.2: v1(37.8,31.8) 39.1,33.1 40.4,33.1 40.7,32.8 P4.4@40.7,31.995 ; U20.14@45.675,11 46,11 46.775,11.775 46.775,16.275 47.7,17.2 v1(47.7,17.4)
  Bottom Layer w0.2: v1(37.8,31.8) 39.23,30.37 44.03,30.37 48.075,26.325 48.075,17.788 47.738,17.451 v1@47.738,17.425 ; v1@47.6,17.206 47.7,17.306 v1(47.7,17.4) ; v1@47.6,17.325 v1@47.6,17.438
Finger_Tap3: P5.4 U20.15 | length 45.7
  Top Layer w0.2: v1(25.1,32.3) 25.87,33.07 28.13,33.07 28.2,33 P5.4@28.2,32.145 ; U20.15@44.875,11.1 44.875,11.475 46.425,13.025 46.425,16.938 47.5,18.013 v1(47.5,18.2)
  Bottom Layer w0.2: v1(25.1,32.3) 25.1,32.224 27.304,30.02 43.885,30.02 47.6,26.305 47.6,18.3 v1(47.5,18.2)
Finger_Tap4: P6.4 U20.16 | length 51.6
  Top Layer w0.2: v1(15.2,30.61) 15.2,30.694 15.7,31.194 15.7,31.5 15.8,31.6 15.8,31.895 P6.4@15.7,31.995 ; U20.16@44.525,11.1 44.525,11.63 46.075,13.18 46.075,17.475 v1(46.7,18.1)
  Bottom Layer w0.2: v1(15.2,30.61) 16.16,29.65 43.76,29.65 47.075,26.335 47.075,18.588 46.7,18.213 v1(46.7,18.1)
Finger_Tap5: P7.4 U20.17 | length 59.4
  Top Layer w0.2: P7.4@6.524,28.182 6.524,28.062 7.239,27.347 v1(7.239,26.892) ; U20.17@44.175,11.1 44.175,11.775 45.725,13.325 45.725,18.125 v1(46.5,18.9)
  Bottom Layer w0.2: v1(7.239,26.892) 7.892,26.892 10.3,29.3 16.015,29.3 43.6,29.3 46.6,26.3 46.6,19 v1(46.5,18.9)